# Altium PCB PMV2_IBV1_Altium.PcbDoc
Units mil, origin at the board's own origin, x right, y up, seen from the top; angles counter-clockwise.
Board outline 3665 x 1496.06 mil, 2 copper layers (Top Layer, Bottom Layer); 33 components, 32 nets, 119 pads, 16 vias.
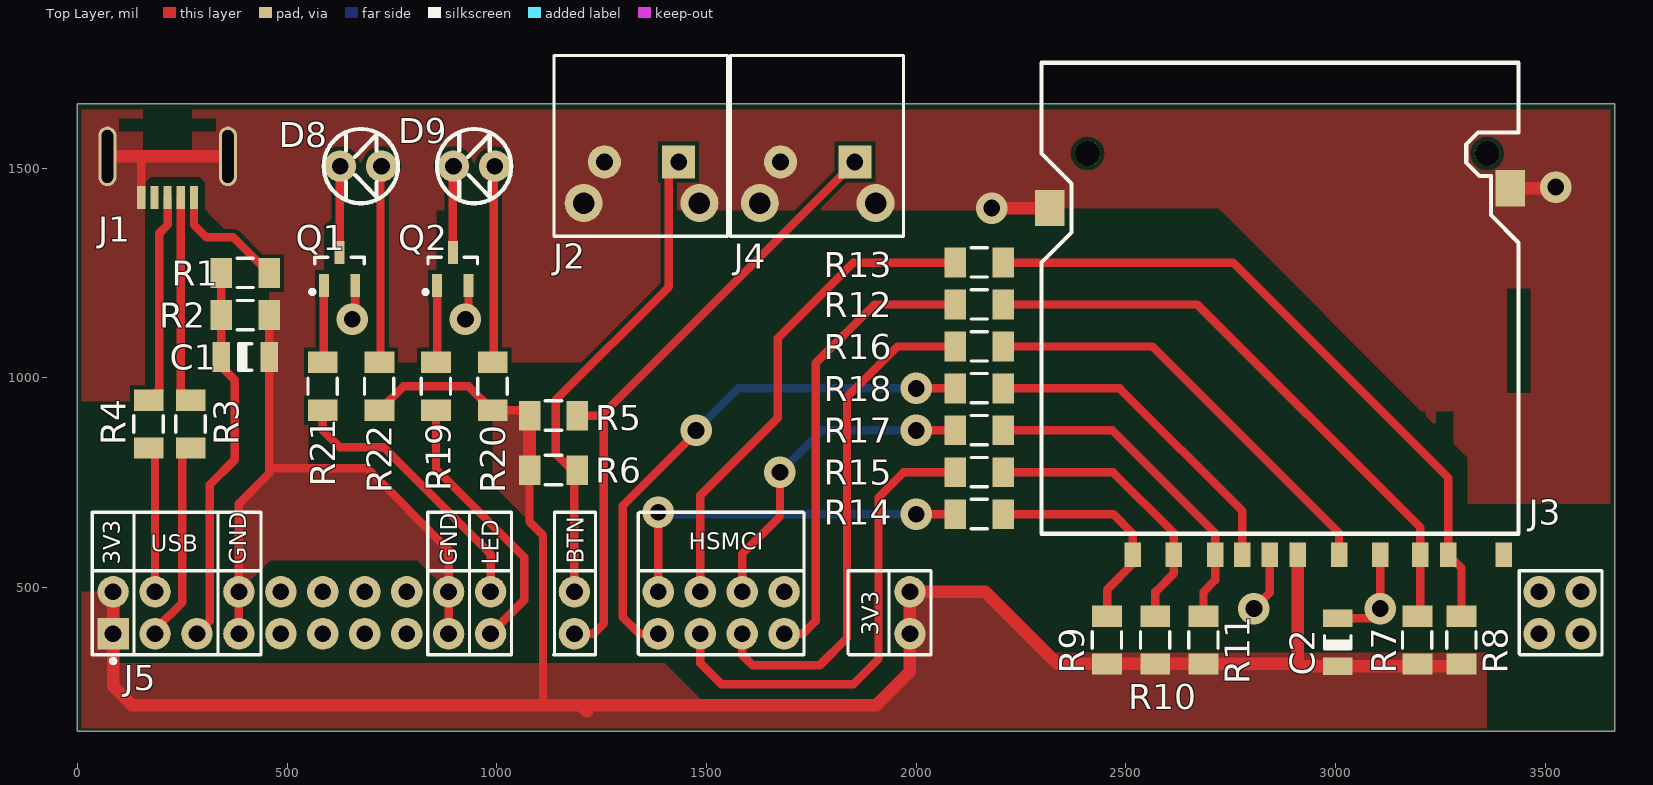
[diagram p0: Top Layer view]
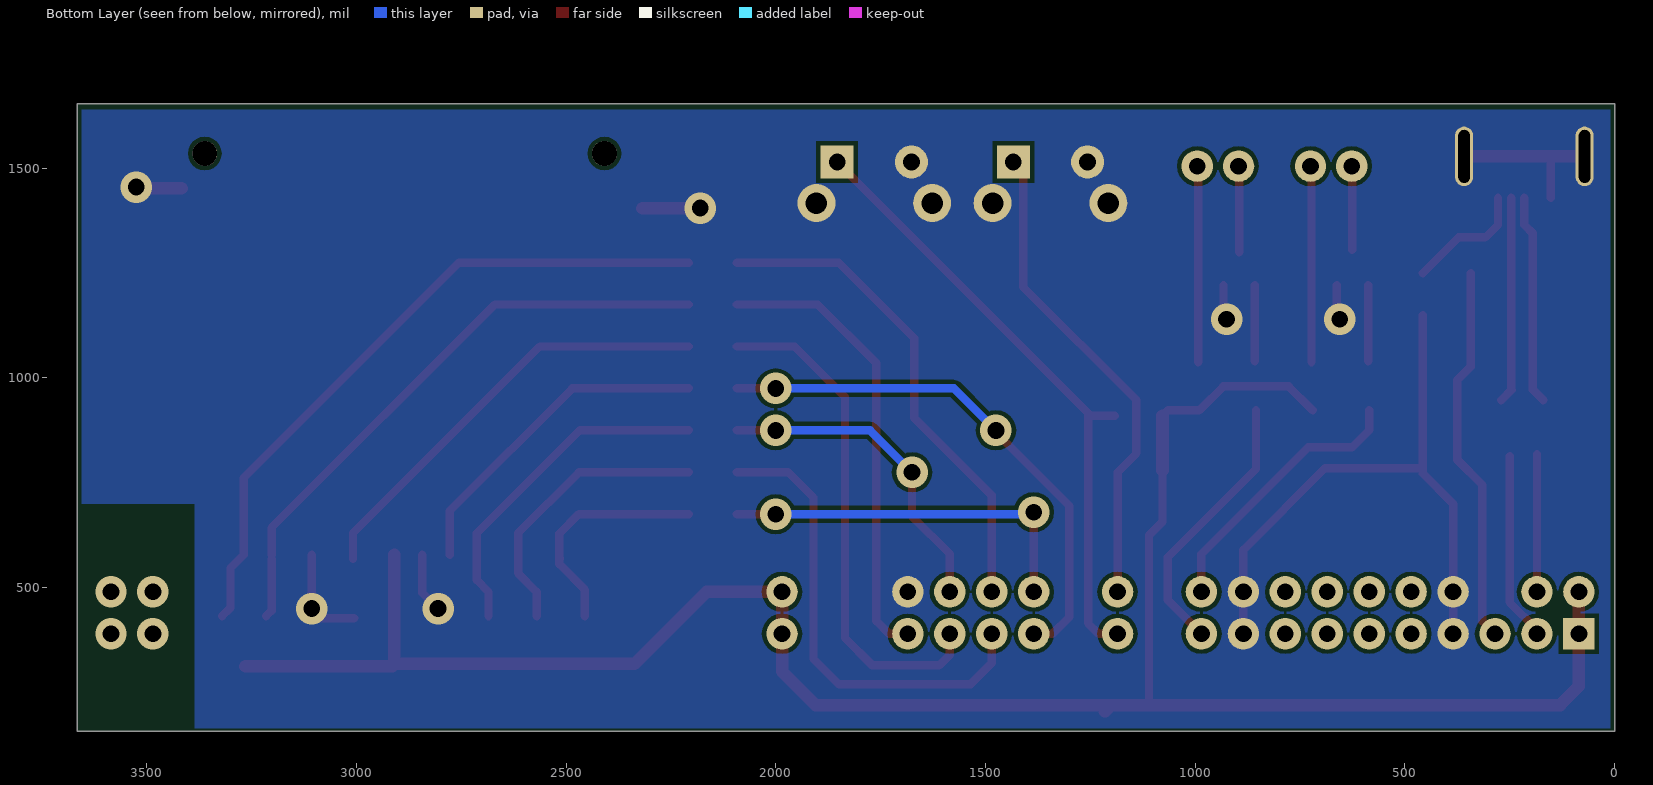
[diagram p1: Bottom Layer view, seen from below]
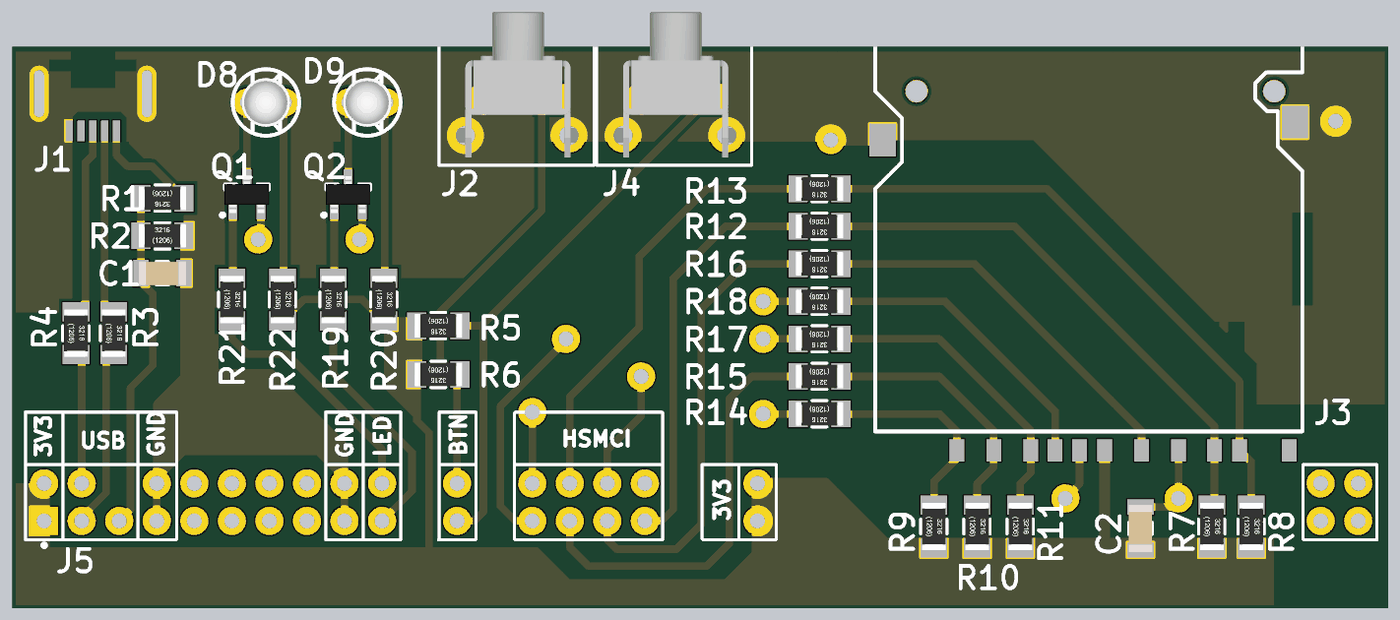
[diagram p2: 3D render of the assembled board from above, using the file's embedded part models]

## Layer stack, top to bottom
Top Solder: solder mask 0.4, Solder Resist, Dk 3.5
Top Layer: signal copper 1.4
Dielectric1: dielectric 12.6, FR-4, Dk 4.8
Bottom Layer: signal copper 1.4
Bottom Solder: solder mask 0.4, Solder Resist, Dk 3.5

## Board outline
0,157.48 0,1653.54 3665,1653.54 3665,157.48

## Design rules (kind name [scope] priority, off if disabled: settings)
Clearance [All] p1: gap=10 ignorepadtopadclearanceinfootprint=FALSE except(0: Arc-Hole Track-Hole SMDPad-Hole THPad-Hole Via-Hole Fill-Hole Poly-Hole Region-Hole Text-Hole)
PlaneClearance [All] p1: clearance=30
PlaneConnect [All] p1: planeconnectstyle=Direct reliefexpansion=20 reliefentries=4 reliefconductorwidth=10 reliefairgap=10
PolygonConnect [All] p1: connectstyle=Direct reliefconductorwidth=10 reliefentries=4 polygonreliefangle="90 Angle" airgapwidth=10
RoutingVias [All] p1: holewidth=28 width=50 viastyle="Through Hole" minholewidth=28 minwidth=50 maxholewidth=28 maxwidth=50
SilkToSolderMaskClearance SilkscreenOverComponentPads [IsPad] p1: minsilkscreentomaskgap=10 clearancetoexposedcopper=TRUE
SolderMaskExpansion [All] p1: expansion=4
Width [All] p1: maxlimit=30 minlimit=10 preferedwidth=20
27 further rules are at their usual default settings.

## Components (designator, comment, footprint, x,y, rotation, side; value= is the part's Value field where it differs from the comment)
C1 "CAP_C1206F104K3RACTU_KEMET" CAPC3216X135N_B 400,1050 r0 top
C2 "CAP_C1206F104K3RACTU_KEMET" CAPC3216X135N_B 3005,370 r90 top
D8 "DIO_LED" Led 725,1505 r180 top
D9 "DIO_LED" Led 995,1505 r180 top
J1 "CON_MINI_USB" "UBS MiniB" 215,1670 r180 top
J2 "MSC_Switch" SW_FSMRA3JH 1345,1515 r180 top
J3 "CON_SD_Socket" "SD CARD SOCKET" 2885,1535 r180 top
J4 "MSC_Switch" SW_FSMRA3JH 1765,1515 r180 top
J5 "CON_Header_2x30_PMV2" HEADERX70B 1785,440 r0 top
Q1 "2N7002" SOT23-3M 625,1260 r90 top
Q2 "2N7002" SOT23-3M 895,1260 r90 top
R1 "RES_RC1206JR-07100KL_YAGEO" RESC3216N 400,1250 r180 top
R2 "RES_RC1206JR-07180KL_YAGEO" RESC3216N 400,1150 r0 top
R3 "RES_RC1206JR-0722RL_YAGEO" RESC3216N 270,890 r270 top
R4 "RES_RC1206JR-0722RL_YAGEO" RESC3216N 170,890 r270 top
R5 "RES_RC1206FR-0710KL_Yageo" RESC3216N 1135,910 r180 top
R6 "RES_RC1206FR-0710KL_Yageo" RESC3216N 1135,780 r180 top
R7 "RES_RC1206JR-0768KL_Yageo" RESC3216N 3195,375 r270 top
R8 "RES_RC1206JR-0768KL_Yageo" RESC3216N 3300,375 r270 top
R9 "RES_RC1206JR-0768KL_Yageo" RESC3216N 2455,375 r270 top
R10 "RES_RC1206JR-0768KL_Yageo" RESC3216N 2570,375 r270 top
R11 "RES_RC1206FR-0710KL_Yageo" RESC3216N 2685,375 r270 top
R12 "RES_RC1206JR-07100RL_Yageo" RESC3216N 2150,1175 r180 top
R13 "RES_RC1206JR-07100RL_Yageo" RESC3216N 2150,1275 r180 top
R14 "RES_RC1206JR-07100RL_Yageo" RESC3216N 2150,675 r180 top
R15 "RES_RC1206JR-07100RL_Yageo" RESC3216N 2150,775 r180 top
R16 "RES_RC1206JR-07100RL_Yageo" RESC3216N 2150,1075 r180 top
R17 "RES_RC1206JR-07100RL_Yageo" RESC3216N 2150,875 r180 top
R18 "RES_RC1206JR-07100RL_Yageo" RESC3216N 2150,975 r180 top
R19 "RES_RC1206FR-071KL_Yageo" RESC3216N 720,980 r270 top
R20 "RES_RC1206FR-071KL_Yageo" RESC3216N 990,980 r270 top
R21 "RES_RC1206FR-071KL_Yageo" RESC3216N 585,980 r270 top
R22 "RES_RC1206FR-071KL_Yageo" RESC3216N 855,980 r270 top

## Footprints (in the part's own frame and the unit in brackets; to place one, negate y for a bottom-side part, rotate by r counter-clockwise, add the part's x,y. Pads: shape width x height; smd on the part's side, far side on the other; paste and mask are expansions set on the pad)
CAPC3216X135N_B [mm] "Chip Capacitor, 1206, UL840 2mm, Body 3.2x1.6mm, IPC Medium Density"
  rect 1.05x1.8 smd: 1(-1.45,0) 2(1.45,0)
  silkscreen extent -0.4,-0.8 0.4,0.8, body extent -1.6,-0.8 1.6,0.8, height 0.79
HEADERX70B [mil]
  rect 75x75 hole 40: 1(-1700,-50)
  round 75 hole 40: 2(-1700,50) 3(-1600,-50) 4(-1600,50) 5(-1500,-50) 7(-1400,-50) 8(-1400,50) 9(-1300,-50) 10(-1300,50) 11(-1200,-50) 12(-1200,50) 13(-1100,-50) 14(-1100,50) 15(-1000,-50) 16(-1000,50) 17(-900,-50) 18(-900,50) 19(-800,-50) 20(-800,50) 23(-600,-50) 24(-600,50) 27(-400,-50) 28(-400,50) 29(-300,-50) 30(-300,50) 31(-200,-50) 32(-200,50) 33(-100,-50) 34(-100,50) 39(200,-50) 40(200,50)
  silkscreen extent -1750,-120 250,240
Led [mil]
  round 75 hole 40: 1(0,0) 2(98.43,0)
  silkscreen extent -39,-88 138,88, body extent -16,-65 114,65, height 237
RESC3216N [mm] "Chip Resistor, Body 3.2x1.6mm, IPC Medium Density"
  rect 1.3x1.8 smd: 1(-1.45,0) 2(1.45,0)
  silkscreen extent -0.5,-0.9 0.5,0.87, body extent -1.6,-0.8 1.6,0.8, height 0.55
"SD CARD SOCKET" [mm]
  round 1.5 hole 1.5: 0(-12.1,0) 0(12.1,0)
  rect 1x1.5 smd: 1(6.875,24.3) 2(4.375,24.3) 3(1.075,24.3) 4(-0.625,24.3) 5(-3.125,24.3) 6(-5.625,24.3) 7(-8.05,24.3) 8(-9.75,24.3) 9(9.375,24.3) CD(2.725,24.3) WP(-13.1,24.3)
  rect 1.778x2.2 smd: 10(14.4,3.3) 11(-13.5,2.1)
  Top Layer pour cut-out: -14.7,8.2 -13.3,8.2 -13.3,14.5 -14.7,14.5
  Top Layer pour cut-out: 9.175,13.2 9.175,15.2 10.275,15.2 10.275,13.2
  Top Layer pour cut-out: 6.8,16 6.8,18.5 7.9,18.5 7.9,16
  Top Layer pour cut-out: -1.1,15.2 -1.1,17.2 0,17.2 0,15.2
  Top Layer pour cut-out: 1.4,15.2 1.4,17.7 3.3,17.7 3.3,15.2
  Top Layer pour cut-out: 4.3,15.7 4.3,17.7 5.4,17.7 5.4,15.7
  Top Layer pour cut-out: -3.525,15.6 -3.525,17.6 -2.425,17.6 -2.425,15.6
  Top Layer pour cut-out: -5.95,15.6 -5.95,17.6 -4.85,17.6 -4.85,15.6
  Top Layer pour cut-out: -8.375,15.6 -8.375,17.6 -7.275,17.6 -7.275,15.6
  Top Layer pour cut-out: -10.075,15.6 -10.075,17.6 -8.975,17.6 -8.975,15.6
  silkscreen extent -14,-5.5 14.9,23.03, body extent -14,-5.5 14.92,23.95, height 4
SOT23-3M [mm] "SOT23, 3-Leads, Body 2.9x1.3mm, Pitch 0.95mm, Lead Span 2.5mm, IPC Low Density"
  rect 1.397x0.6 smd: 1(-1,0.95) 2(-1,-0.95) 3(1,0)
  silkscreen extent -1.52,-1.5 0.7,1.78, body extent -1.25,-1.5 1.25,1.5, height 1.06
SW_FSMRA3JH [mm] "FSMRA3JH Push Button"
  rect 2x2 hole 1.016: 1(-2.25,0)
  round 2 hole 1.016: 2(2.25,0)
  round 2.3 hole 1.3: 3(-3.505,2.49) 3(3.505,2.49)
  silkscreen extent -5.2,-6.45 5.3,4.5, body extent -4.25,-5.85 4.15,3.99, height 7
"UBS MiniB" [mm]
  rect 0.5x1.4 smd: 1(-1.6,6.1) 2(-0.8,6.1) 3(0,6.1) 4(0.8,6.1) 5(1.6,6.1)
  rrect100% 1.1x3.6 hole 0.7 slot 3.2 at 90 deg: MH1(3.65,3.6) MH2(-3.65,3.6)
  Top Layer pour cut-out: 2.95,2.1 1.5,2.1 1.5,1.3 2.95,1.3
  Top Layer pour cut-out: 2.95,0.5 1.5,0.5 1.5,0 2.95,0
  Top Layer pour cut-out: -1.5,0.5 -2.95,0.5 -2.95,0 -1.5,0
  Top Layer pour cut-out: -1.5,2.1 -2.95,2.1 -2.95,1.3 -1.5,1.3
  Top Layer pour cut-out: -1.5,0 1.5,0 1.5,3.6 -1.5,3.6
  body extent -3.85,-0.5 3.85,6.5, height 3.9

## Part data
C1 C2: "CAP CER 0.1UF 25V X7R 1206"
D8 D9: "Diode Led"
J3: "SD Socket"
Q1 Q2: library part Q_2N7002-7-F_DIODES, "MOSFET N-CH 60V 115MA SOT23-3"
R1: "RES SMD 100K OHM 5% 1/4W 1206"
R2: "RES SMD 180K OHM 5% 1/4W 1206"
R3 R4: "RES SMD 22 OHM 5% 1/4W 1206"
R5 R6 R11: "RES SMD 10K OHM 1% 1/4W 1206"
R7 R8 R9 R10: "RES SMD 68K OHM 5% 1/4W 1206"
R12 R13 R14 R15 R16 R17 R18: "RES SMD 100 OHM 5% 1/4W 1206"
R19 R20 R21 R22: "RES SMD 1K OHM 1% 1/4W 1206"

## Via types
v1: diameter 75, hole 40, Top Layer to Bottom Layer, 16 vias

## Nets (pads, with @x,y where several pads share a name; then routed paths per layer and width w, separated by ;. In a path a pad name is that pad's centre, name@x,y a point inside that pad or via, vN(x,y) a via of type N, cw(c..) or ccw(c..) an arc to the next point about the centre after c; other vN are vias at no path point)
3V3: C2.1 J3.4 J5.1 J5.2 J5.39 J5.40 R5.2 R6.2 R7.2 R8.2 R9.2 R10.2 R11.2 R19.2 R20.2 | length 5112.3
  Top Layer w20: R19.2 777.09,980 932.91,980 R20.2 1065,922.91 R5.2 ; R6.2 1077.91,657.09 1110,625 1110,220 ; 2909.61,318.31 2915,312.91
  Top Layer w30: J5.2 J5.1 85,265 130,220 1110,220 1207.09,220 ; R6.2 R5.2 ; 1215,205 1207.09,212.91 1207.09,220 ; J3.4 2909.61,318.31 2336.69,318.31 2165,490 J5.40 J5.39 1985,300 1905,220 1207.09,220 ; 2915,312.91 R8.2@3265,312.91
BTN01: J4.1 J5.23 R5.1 | length 1484.8
  Top Layer w20: J5.23 1230,390 1255,415 1255,916.42 J4.1 ; R5.1 1248.58,910
BTN02: J2.1 J5.24 R6.1 | length 1165.2
  Top Layer w20: J5.24 1185,775 1140,820 1140,947.22 1410,1217.22 1410,1491.42 J2.1
GND: C1.2 C2.2 J1.5 J1.MH1 J1.MH2 J2.2 J2.3 J3.3 J3.6 J3.10 J3.11 J4.2 J4.3 J5.7 J5.8 J5.17 J5.18 J5.34 Q1.2 Q2.2 R2.2 | length 2720.6
  Top Layer w20: J1.5 152.01,1524.33 155.94,1528.27 ; J5.7 J5.8 385,700 457.09,772.09 457.09,840 ; 457.09,785 690,785 885,590 J5.18 J5.17 ; 457.09,797.09 R2.2 ; v1@662.4,1142.6 Q1.2 ; v1@932.4,1142.6 Q2.2 ; v1(2805,450) 2842.68,487.68 J3.3 ; C2.2 3093.54,427.09 3106.46,440 J3.6
  Top Layer w30: J1.MH1 155.94,1528.27 J1.MH2 ; v1(2180,1405) 2180.08,1405.08 J3.10 ; J3.11 v1@3525,1452.32
  other v1: 3106.46,450 655,1140 925,1140 3525,1455
LED_GREEN: J5.20 R21.2 | length 660.1
  Top Layer w20: R21.2 585,875 625,835 730,835 985,580 J5.20
LED_RED: J5.19 R22.2 | length 653
  Top Layer w20: R22.2 855,782.91 1065,572.91 1065,470 J5.19
NetD8_1: D8.1 R19.1 | length 468.9
  Top Layer w20: R19.1@722.5,1037.09 722.5,1502.5 D8.1
NetD8_2: D8.2 Q1.3 | length 200.7
  Top Layer w20: Q1.3@625,1305 625,1503.43 D8.2
NetD9_1: D9.1 R20.1 | length 468.9
  Top Layer w20: R20.1@992.5,1037.09 992.5,1502.5 D9.1
NetD9_2: D9.2 Q2.3 | length 206.3
  Top Layer w20: Q2.3 895,1503.43 D9.2
NetJ1_1: J1.1 R1.1 | length 291.6
  Top Layer w20: J1.1 277.99,1364.92 307.91,1335 372.09,1335 R1.1
NetJ1_2: J1.2 R3.1 | length 494.6
  Top Layer w20: R3.1@245,972.09 R3.1@246.5,970.59 ; J1.2 R3.1@246.5,970.59 ; R3.1 R3.1@246.5,970.59
NetJ1_3: J1.3 R4.1 | length 501.4
  Top Layer w20: R4.1 195,972.09 195,1345 215,1365 J1.3
NetJ3_1: J3.1 R10.1 R15.1 | length 683.6
  Top Layer w20: R15.1 2469.33,775 2614.33,630 J3.1 2614.33,534.33 2570,490 R10.1
NetJ3_2: J3.2 R11.1 R17.1 | length 816.6
  Top Layer w20: R17.1 2467.76,875 2712.76,630 J3.2 2712.76,517.76 2685,490 R11.1
NetJ3_5: J3.5 R16.1 | length 1047
  Top Layer w20: R16.1 2563.03,1075 3008.03,630 J3.5 J3.5@3008.03,568.31
NetJ3_7: J3.7 R7.1 R12.1 | length 1421.6
  Top Layer w20: R12.1 2670,1175 3201.93,643.07 J3.7 ; J3.7@3201.93,568.31 3201.93,445.16 R7.1@3215,432.09
NetJ3_8: J3.8 R8.1 R13.1 | length 1624.9
  Top Layer w20: R13.1 2755,1275 3268.86,761.14 J3.8 3300,547.17 3300,452.09 R8.1@3320,432.09
NetJ3_9: J3.9 R9.1 R14.1 | length 561
  Top Layer w20: R14.1 2470,675 2515.91,629.09 J3.9 ; R9.1 2455,495 2515.91,555.91 J3.9 ; J3.9@2515,567.4 J3.9
NetJ3_CD: J3.CD R18.1 | length 795.9
  Top Layer w20: R18.1 2485,975 2777.72,682.28 J3.CD
NetQ1_1: Q1.1 R21.1 | length 180.9
  Top Layer w20: R21.1@587.6,1039.68 Q1.1
NetQ2_1: Q2.1 R22.1 | length 180.9
  Top Layer w20: R22.1@857.6,1039.68 Q2.1
SD_CD: J5.27 R18.2 | length 1266.3
  Top Layer w20: J5.27 1340,390 1300,430 1300,695 v1@1470,865 ; v1(2000,975) R18.2
  Bottom Layer w20: v1(1475,875) 1575,975 v1(2000,975)
SD_MCCDA: J5.32 R17.2 | length 781.6
  Top Layer w20: J5.32 1585,580 1675,670 v1(1675,775) ; v1(2000,875) R17.2
  Bottom Layer w20: v1(1675,775) 1775,875 v1(2000,875)
SD_MCCK: J5.31 R16.2 | length 1219.9
  Top Layer w20: J5.31 1585,340 1610,315 1770,315 1835,380 1835,955 1955,1075 R16.2
SD_MCDA0: J5.33 R12.2 | length 1093.3
  Top Layer w20: J5.33 1730,390 1760,420 1760,1035 1900,1175 R12.2
SD_MCDA1: J5.30 R13.2 | length 1179.1
  Top Layer w20: J5.30 1485,720 1670,905 1670,1095 1850,1275 R13.2
SD_MCDA2: J5.28 R14.2 | length 900
  Top Layer w20: J5.28 v1(1385,680) ; v1(2000,675) R14.2
  Bottom Layer w20: v1(1385,680) 1390,675 v1(2000,675)
SD_MCDA3: J5.29 R15.2 | length 1133.3
  Top Layer w20: J5.29 1485,320 1535,270 1850,270 1910,330 1910,715 1970,775 R15.2
USB_DDM: J5.3 R3.2 | length 449.8
  Top Layer w20: J5.3 185,400 250,465 R3.2@250,812.91
USB_DDP: J5.4 R4.2 | length 327.9
  Top Layer w20: J5.4 R4.2@185,817.91
USB_VBUS: C1.1 J5.5 R1.2 R2.1 | length 910.6
  Top Layer w20: J5.5 315,420 315,745 375,805 375,995 342.91,1027.09 R1.2
pads on no net: J1.4 J3.0 J3.WP J5.9 J5.10 J5.11 J5.12 J5.13 J5.14 J5.15 J5.16
copper on no net:
  other v1: 3485,390 3585,390 3485,490 3585,490

## Polygon pours and split planes (outlines as drawn)
GND on Bottom Layer "GND" (solid, pour order 4): 10,165 3655,165 3655,1640 10,1640
GND on Top Layer "GND" (solid, pour order 12): 10,1400 160,1400 160,1465 175,1480 290,1480 305,1465 305,1400 430,1400 430,1640 10,1640
GND on Top Layer "GND" (solid, pour order 31): 160,1435 160,945 10,945 10,1435
GND on Top Layer "GND" (solid, pour order 29): 457.09,785 457.09,1247.91 305,1400 604.61,1400 604.61,1379.61 585,1360 587.6,1357.4 587.6,1039.68 550.32,1039.68 550,1040 550,785
GND on Top Layer "GND" (solid, pour order 27): 725,1505 722.5,1502.5 722.5,1037.09 855,1037.09 857.6,1039.68 855,1042.28 855,1505
GND on Top Layer "GND" (solid, pour order 25): 992.5,1502.5 992.5,1037.09 1229.87,1037.09 1410,1217.22 1410,1500
GND on Top Layer "GND" (solid, pour order 21): 385,490 385,700 457.09,772.09 457.09,785 690,785 885,590 885,490 810,565 485,565 460,565 385,490
3V3 on Top Layer "GND" (solid, pour order 13): 1077.91,657.09 1077.91,910 1065,922.91 990,922.91 990,795 990,745 1077.91,657.09
3V3 on Top Layer "GND" (solid, pour order 7): 100,320 1400,320 1490,230 100,230
3V3 on Top Layer "GND" (solid, pour order 6): 85,490 10,490 10,165 3360,165 3360,345 2310,345 2165,490 1985,490 1985,300 1905,220 130,220 85,265
GND on Top Layer "GND" (solid, pour order 16): 3655,700 3315,700 3315,810 2740,1385 2720,1405 2180,1405 2180,1640 3655,1640
GND on Top Layer "GND" (solid, pour order 20): 305,1400 2175,1400 2180.08,1405.08 2180,1405.16 2180,1640 305,1640

## Other copper
Bottom Layer:
  pour cut-out: 3655,165 3655,700 3385,700 3385,165

## Silkscreen, mask and mechanical layers (free items; w line width, h text height)
Top Overlay:
  lines w7.87: 3437.5,342.5 3437.5,540 3532.5,540 ; 3440,340 3535,340 3635,340 3635,540 3535,540
Mechanical 1:
  lines w10: 0,157.48 3665,157.48 ; 0,0 0,150 0,1653.54 3665,1653.54 3665,150 3665,0 0,0

## Dimensions
0,0 to 0,157.48 on Mechanical 1
0,157.48 to 0,1653.54 on Mechanical 1

## Text inside footprints (layer, text, board x,y; h text height)
J5: Top Overlay "3V3" at 102.5,555 h40 r90; Top Overlay "USB" at 175,585 h40; Top Overlay "GND" at 402.5,555 h40 r90; Top Overlay "LED" at 1005,555 h40 r90; Top Overlay "GND" at 905,552.5 h40 r90; Top Overlay "HSMCI" at 1457.5,590 h40; Top Overlay "3V3" at 1910,385 h40 r90; Top Overlay "BTN" at 1207.5,557.5 h40 r90